# Altium PCB PCB2.PcbDoc
Units mm, origin at the board's own origin, x right, y up, seen from the top; angles counter-clockwise.
Board outline 50 x 30 mm, 2 copper layers (Top Layer, Bottom Layer), stack 1.571 mm thick; 4 components, 37 nets, 36 pads, 16 vias.
Unrouted connection lines stored in the file: 2.
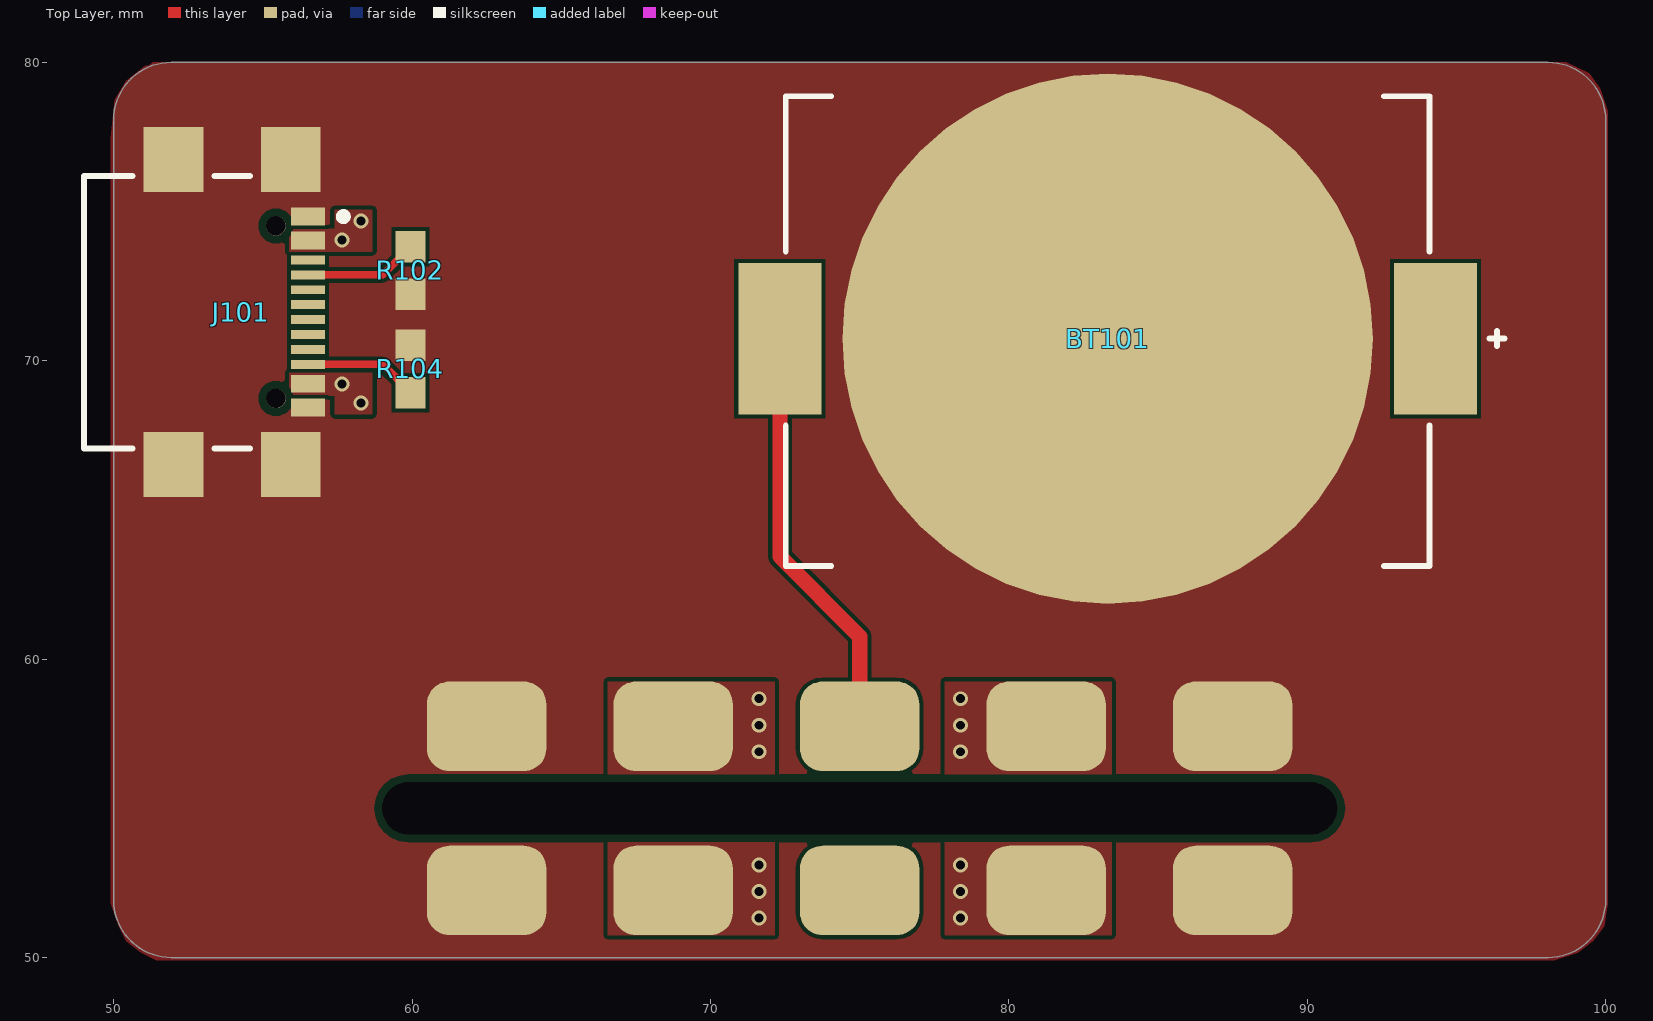
[diagram p0: Top Layer view]
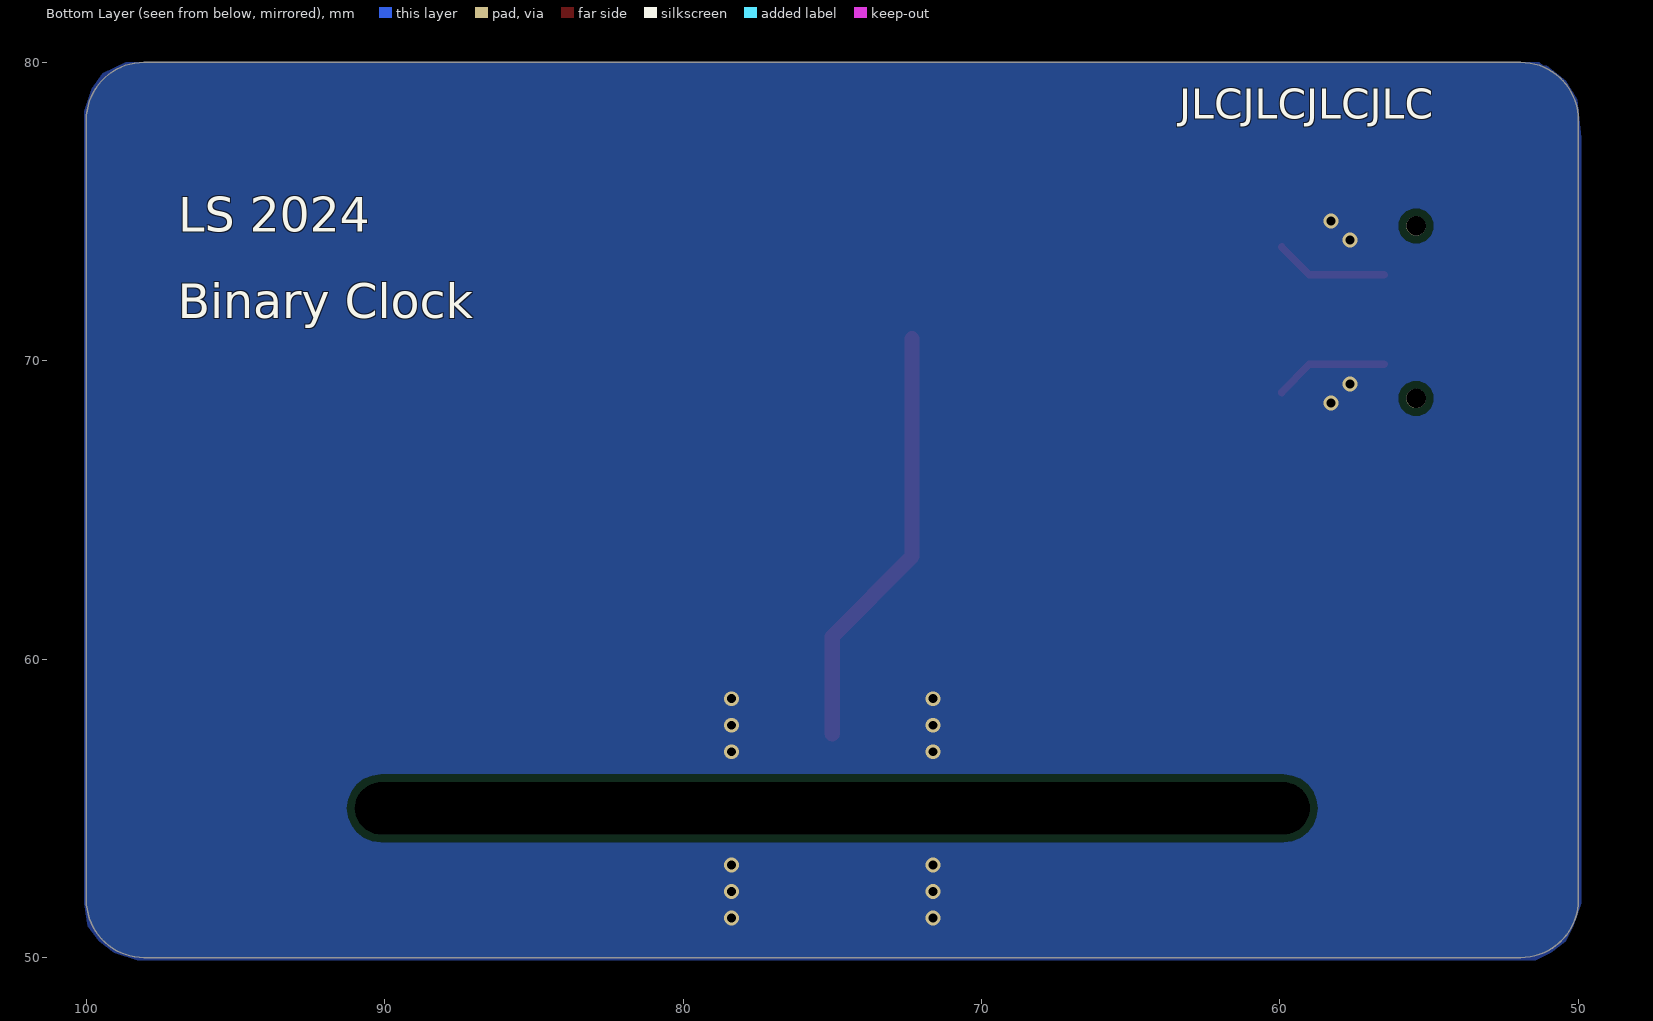
[diagram p1: Bottom Layer view, seen from below]
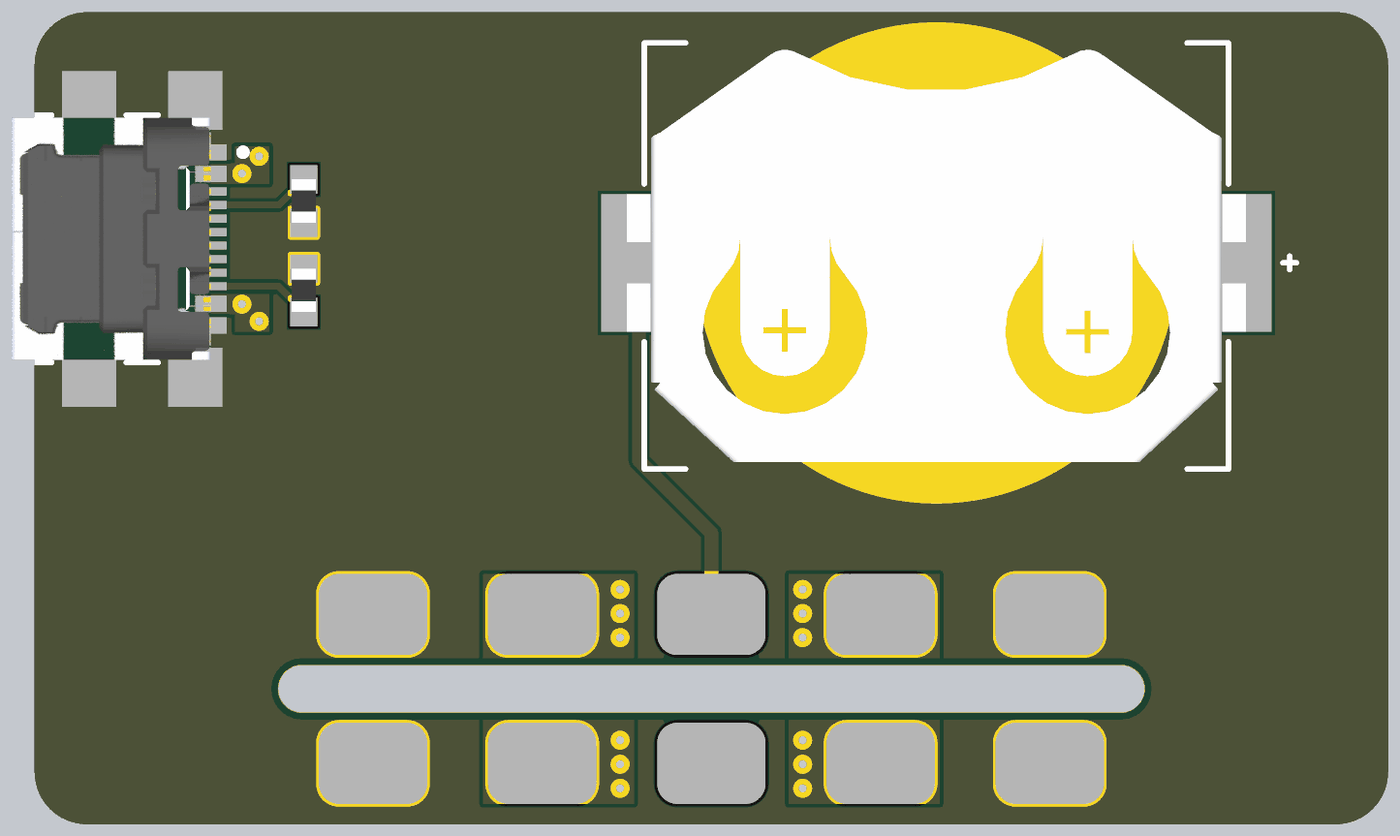
[diagram p2: 3D render of the assembled board from above, using the file's embedded part models]

## Layer stack, top to bottom
Top Solder: solder mask 0.0102, Solder Resist, Dk 3.5
Top Layer: signal copper 0.0356
Dielectric 1: dielectric 1.5, FR-4, Dk 4.8
Bottom Layer: signal copper 0.0356
Bottom Solder: solder mask 0.0102, Solder Resist, Dk 3.5

## Board outline
51.933,50 cw(c51.933,51.933) 50,51.933 50,78.067 cw(c51.933,78.067) 51.933,80 98.067,80 cw(c98.067,78.067) 100,78.067 100,51.933 cw(c98.067,51.933) 98.067,50

## Design rules (kind name [scope] priority, off if disabled: settings)
Clearance [All] p1: gap=0.127 ignorepadtopadclearanceinfootprint=FALSE except(0.254: Arc-Hole Track-Hole SMDPad-Hole THPad-THPad THPad-Hole Via-Via Via-Hole Fill-Hole Poly-Hole Region-Hole Text-Hole)
PolygonConnect [All] p1: connectstyle=Direct reliefconductorwidth=0.254 reliefentries=4 polygonreliefangle="90 Angle" airgapwidth=0.254
RoutingVias [All] p1: holewidth=0.3 width=0.5 viastyle="Through Hole" minholewidth=0.3 minwidth=0.5 maxholewidth=300 maxwidth=500
SolderMaskExpansion SolderMaskExpansion_VIA [IsVia] p1: expansion=-100 istentingtop=FALSE
SolderMaskExpansion [All] p2: expansion=0.102 istentingtop=FALSE
SupplyNets "Schematic Supply Nets_1" [InNet('GND')] p1: voltage=0.000
SupplyNets "Schematic Supply Nets" [InNet('+5')] p2: voltage=0.000
Width [All] p1: maxlimit=254 minlimit=0.127 preferedwidth=0.254
30 further rules are at their usual default settings.

## Classes and differential pairs
component class ClockBase: BT101 J101

## Components (designator, comment, footprint, x,y, rotation, side; value= is the part's Value field where it differs from the comment)
BT101 "BK-912" FP-BK-912-MFG 83.312,70.993 r180 top
J101 "USB4110-GF-A" FP-USB4110-GF-A-MFG 52.832,71.628 r270 top locked
R102 "Resistor" RESC1608X06N 59.944,73.025 r90 top
R104 "Resistor" RESC1608X06N 59.944,69.723 r270 top

## Footprints (in the part's own frame and the unit in brackets; to place one, negate y for a bottom-side part, rotate by r counter-clockwise, add the part's x,y. Pads: shape width x height; smd on the part's side, far side on the other; paste and mask are expansions set on the pad)
FP-BK-912-MFG [mm]
  round 17.78 smd paste-1000 mask+0: 1(0,0.255)
  rect 2.79x5.08 smd paste+0 mask+0: 2(-10.985,0.255) 2(10.985,0.255)
  silkscreen extent -13.3,-7.87 10.79,7.87, body extent -12.48,-8.73 12.48,9.25, height 0.25
FP-USB4110-GF-A-MFG [mm]
  rect 2.18x2 smd paste+0 mask+0: 1(-5.11,3.105) 2(5.11,3.105) 3(-5.11,-0.825) 4(5.11,-0.825)
  rect 0.6x1.15 smd paste+0 mask+0: A1-B12(-3.2,3.68) A4-B9(-2.4,3.68) B1-A12(3.2,3.68) B4-A9(2.4,3.68)
  rect 0.3x1.15 smd paste+0 mask+0: A5(-1.25,3.68) A6(-0.25,3.68) A7(0.25,3.68) A8(1.25,3.68) B5(1.75,3.68) B6(0.75,3.68) B7(-0.75,3.68) B8(-1.75,3.68)
  round 0.65 hole 0.65 unplated paste-2539.97 mask+0: ""(-2.89,2.605) ""(2.89,2.605)
  silkscreen extent -4.57,-3.83 4.57,4.99, body extent -6.3,-3.92 6.3,4.36, height 0.25
RESC1608X06N [mm] "Chip Resistor, 2-Leads, Body 1,55x0,85mm, IPC Medium Density"
  rect 1.05x1 smd: 1(-0.8,0) 2(0.8,0)
  body extent -0.8,-0.45 0.8,0.45, height 0.6

## Part data
BT101: library part CMP-136216-000003-1, "BATTERY RETAINER COIN 20MM SMD", Case/Package=SMD/SMT, Package Quantity=100, Mount="Surface Mount", Number of Cells=1, Termination=SMD/SMT
J101: library part CMP-245163-000002-1, "CONN USB 2.0 TYPE-C R/A SMT", Current Rating=3/4.25/1.25/0.25A, Manufacturer=GCT, Package=0, Temperature="-40°C to +85°C", Temperature Range High=+85°C, Temperature Range Low=-40°C, Voltage Rating=20V, Automotive=No, Category=Conn, ComponentLink2Description=Datasheet, ComponentLink2URL=https://gct.co/files/drawings/usb4110.pdf, Conn Orientation="Right Angle", Contact Material=Gold,Nickel, Device Class L1=Connectors, Device Class L2="USB Connectors", Device Class L3=unset, Digikey Description="CONN USB 2.0 TYPE-C R/A SMT", Height=3.46mm, Is Female=yes, Lead Free=Yes, Manufacturer Part Number=USB4110-GF-A, Number Of Contacts=16, Octopart=https://octopart.com/usb4110-gf-a-gct-103941985, RoHS=TRUE, Shielding=true, Standoff Height=0.1mm, Usb Standard="USB 2.0"
R102 R104: library part R0603

## Free pads (board coordinates)
  round 0 hole 1.75 slot 32 at 0 deg: 1(75,55)
  rrect50% 4x3 smd: 2(62.5,52.25) 2(87.5,57.75) 3(68.75,52.25) 3(81.25,57.75) 4(75,52.25) 4(75,57.75) 5(68.75,57.75) 5(81.25,52.25) 6(62.5,57.75) 6(87.5,52.25)

## Via types
v1: diameter 0.5, hole 0.3, Top Layer to Bottom Layer, 16 vias

## Nets (pads, with @x,y where several pads share a name; then routed paths per layer and width w, separated by ;. In a path a pad name is that pad's centre, name@x,y a point inside that pad or via, vN(x,y) a via of type N, cw(c..) or ccw(c..) an arc to the next point about the centre after c; other vN are vias at no path point)
32k: 
+5: J101.A4-B9 J101.B4-A9 pad.3 pad.5
  other v1: 71.628,51.326 78.372,51.326 71.628,52.215 78.372,52.215 71.628,53.104 78.372,53.104 71.628,56.896 78.372,56.896 71.628,57.785 78.372,57.785 71.628,58.674 78.372,58.674 58.293,68.58 57.658,69.215 57.658,74.041 58.293,74.676
CC1: J101.A5 R102.2 | length 3.8
  Top Layer w0.254: J101.A5 59.022,72.878 59.944,73.8 R102.2
CC2: J101.B5 R104.2 | length 3.8
  Top Layer w0.254: J101.B5 59.014,69.878 59.944,68.948 R104.2
FN1: 
FN2: 
FN3: 
GND: BT101.1 J101.1 J101.2 J101.3 J101.4 J101.A1-B12 J101.B1-A12 pad.2 pad.6 R102.1 R104.1
INT: 
LED_DI: 
NetBT101_2: BT101.2 pad.4 | length 14.3
  Top Layer w0.508: BT101.2@72.327,70.738 72.327,63.436 75,60.763 pad.4@75,57.5
NetC101_2: 
NetC102_2: 
NetC103_2: 
NetTP101_TP: 
NetU103_1: 
NetU104_1: 
NetU105_1: 
NetU106_1: 
NetU107_1: 
NetU108_1: 
NetU109_1: 
NetU110_1: 
NetU111_1: 
NetU112_1: 
NetU113_1: 
NetU114_1: 
NetU115_1: 
NetU116_1: 
NetU117_1: 
NetU118_1: 
NetU119_1: 
NetU120_1: 
NetU121_1: 
RST: 
SCL: 
SDA: 
pads on no net: J101. J101.A6 J101.A7 J101.A8 J101.B6 J101.B7 J101.B8

## Polygon pours and split planes (outlines as drawn)
GND on Top Layer "GND_L01_P006" (solid, pour order 6): 51.308,80.01 51.181,79.883 51.054,79.883 50.419,79.375 50.038,78.74 49.911,77.47 49.911,51.816 50.165,51.054 50.419,50.546 50.927,50.165 51.435,49.911 98.298,49.911 99.06,50.165 99.568,50.546 99.949,51.054 100.076,51.816 100.076,78.359 99.822,79.121 99.441,79.629 98.679,80.01
+5 on Top Layer "+5_L01_P002" (solid, pour order 2): 77.851,59.25 83.439,59.25 83.439,55.948 77.851,55.948
+5 on Top Layer "+5_L01_P005" (solid, pour order 5): 72.149,59.25 66.561,59.25 66.561,55.948 72.149,55.948
+5 on Top Layer "+5_L01_P004" (solid, pour order 4): 72.149,50.75 66.561,50.75 66.561,54.052 72.149,54.052
+5 on Top Layer "+5_L01_P003" (solid, pour order 3): 77.851,50.75 83.439,50.75 83.439,54.052 77.851,54.052
+5 on Top Layer "+5_L01_P002" (solid, pour order 1): 55.88,68.834 57.404,68.834 57.404,68.199 58.674,68.199 58.674,69.596 55.88,69.596
+5 on Top Layer "+5_L01_P000" (solid, pour order 0): 55.88,74.422 57.404,74.422 57.404,75.057 58.674,75.057 58.674,73.66 55.88,73.66
+5 on Bottom Layer "+5_L02_P007" (solid, pour order 7): 51.308,80.01 51.181,79.883 51.054,79.883 50.419,79.375 50.038,78.74 49.911,77.47 49.911,51.816 50.165,51.054 50.419,50.546 50.927,50.165 51.435,49.911 98.298,49.911 99.06,50.165 99.568,50.546 99.949,51.054 100.076,51.816 100.076,78.359 99.822,79.121 99.441,79.629 98.679,80.01

## Silkscreen, mask and mechanical layers (free items; w line width, h text height)
Bottom Overlay:
  text "JLCJLCJLCJLC" at 63.373,78.105 h1
  text "LS 2024" at 96.924,73.938 h2
  text "Binary Clock" at 96.936,71.043 h2
Mechanical 1:
  the board outline again, w0.254